# Altium PCB PCB1.PcbDoc
Units mm, origin at the board's own origin, x right, y up, seen from the top; angles counter-clockwise.
Board outline 63.7 x 33.37 mm, 2 copper layers (Top Layer, Bottom Layer), stack 1.57 mm thick; 34 components, 42 nets, 188 pads, 66 vias.
Unrouted connection lines stored in the file: 1.
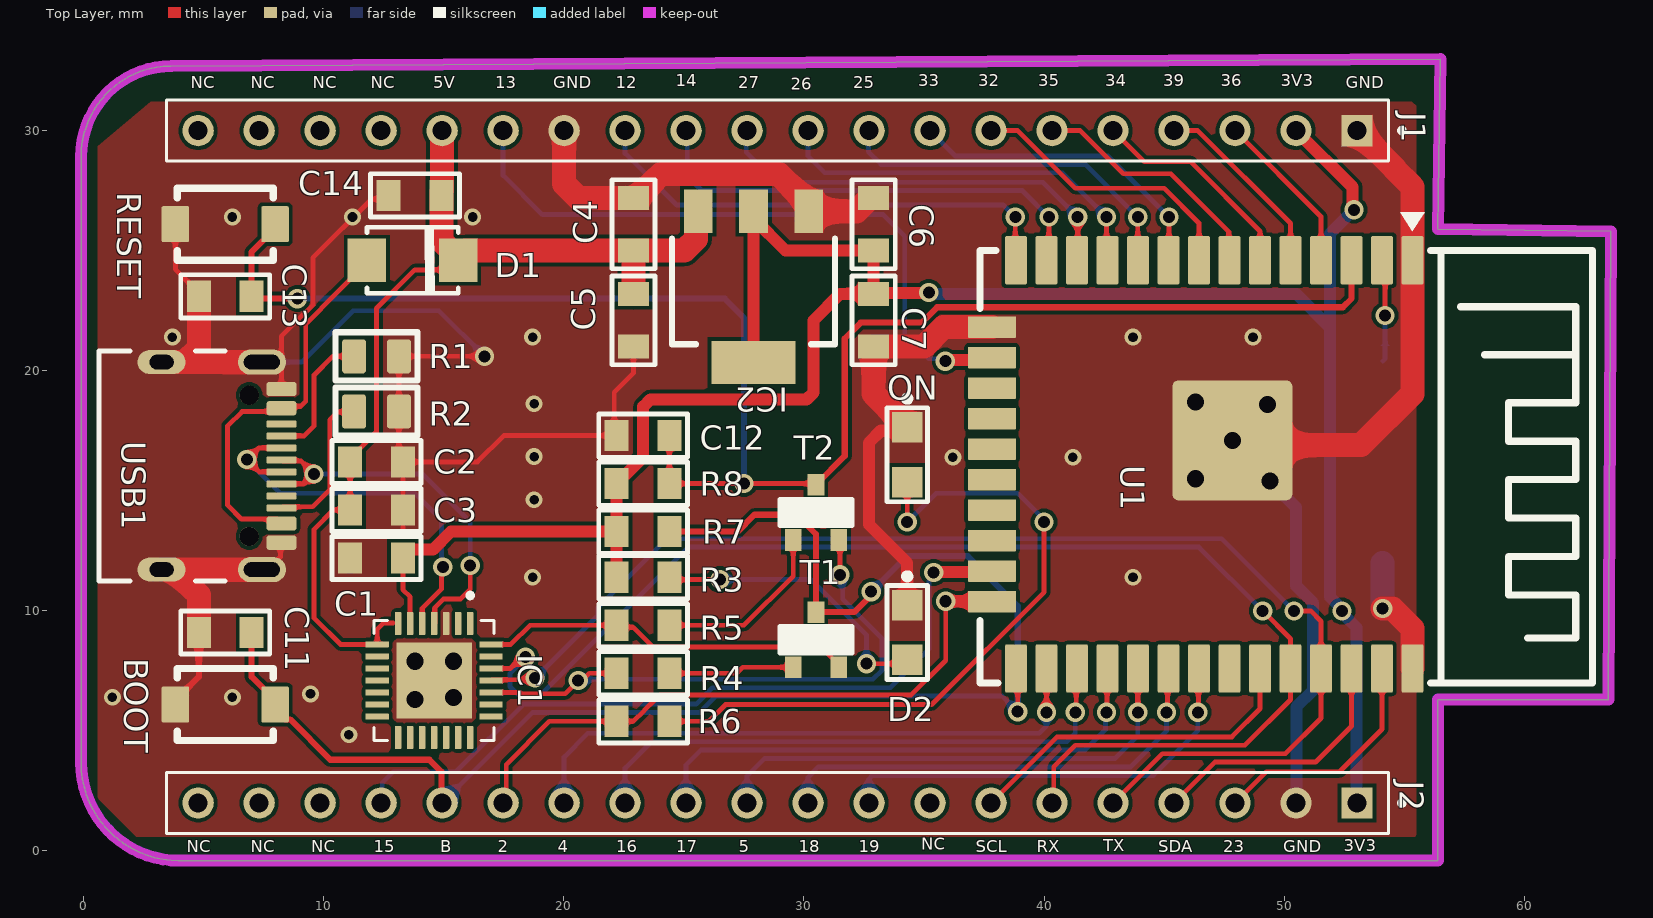
[diagram p0: Top Layer view]
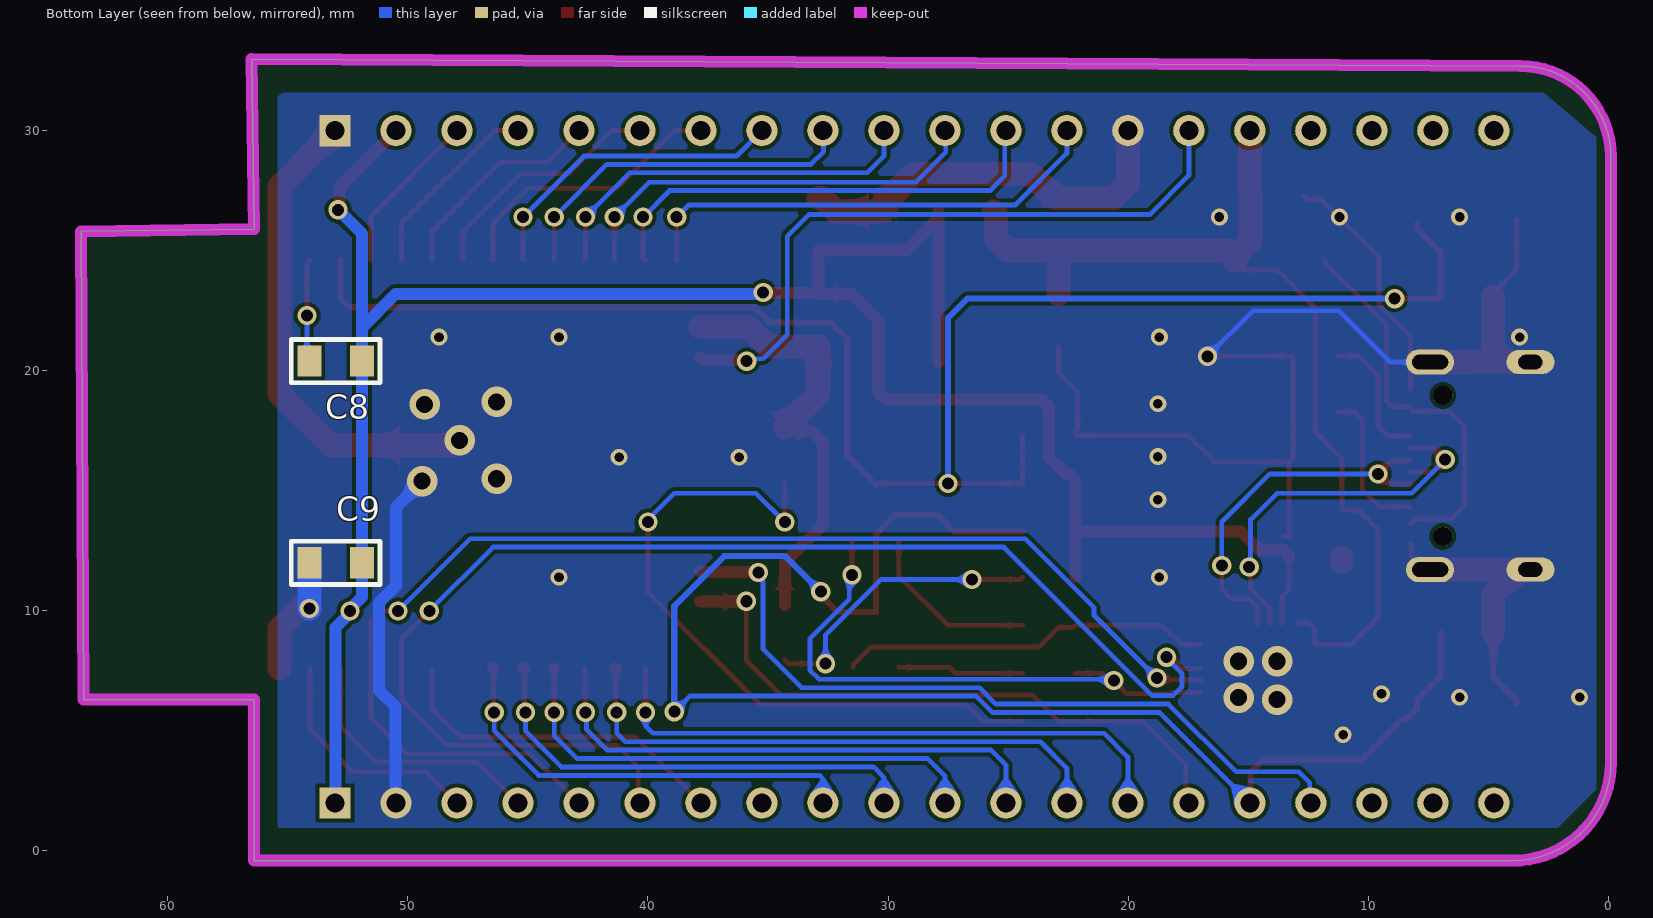
[diagram p1: Bottom Layer view, seen from below]
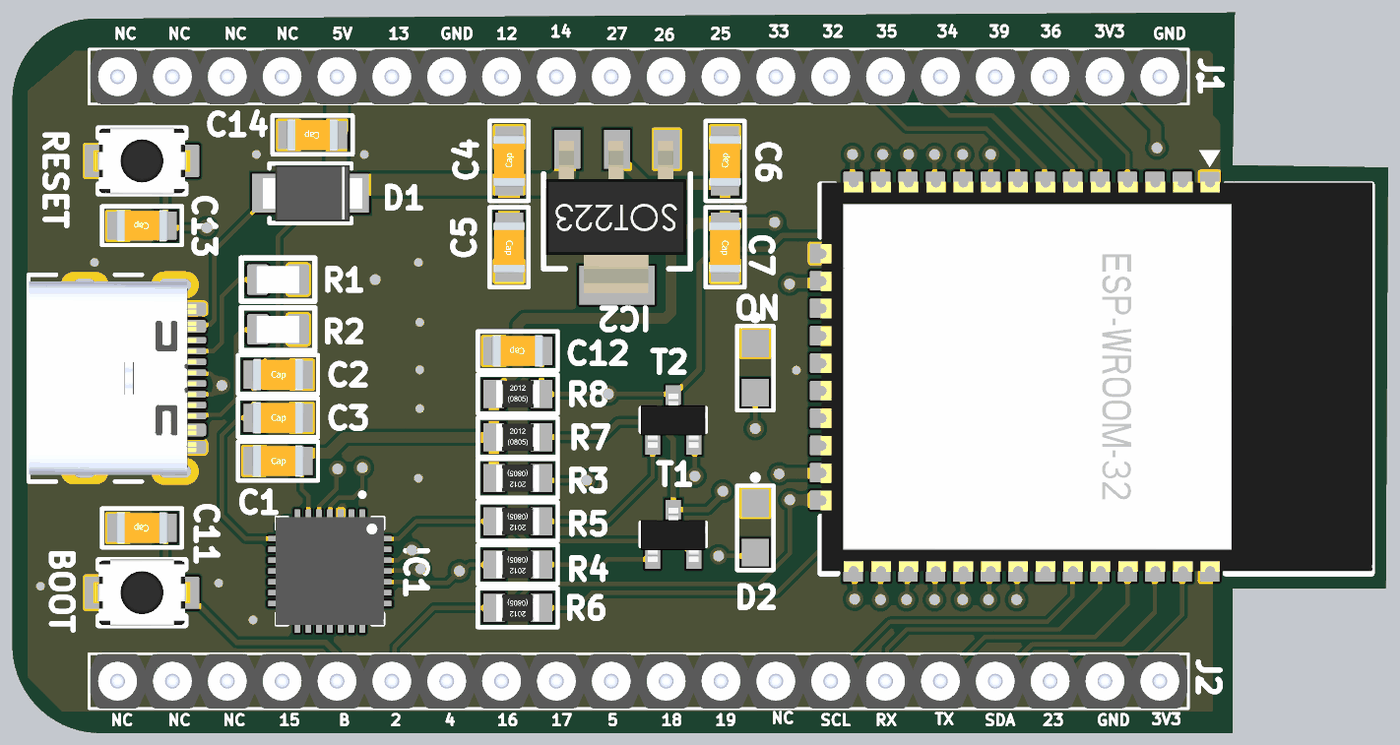
[diagram p2: 3D render of the assembled board from above, using the file's embedded part models]

## Layer stack, top to bottom
Top Solder: solder mask 0.01, Solder Resist, Dk 3.5
Top Layer: signal copper 0.03
Dielectric 1: dielectric 1.51, FR-4, Dk 4.8
Bottom Layer: signal copper 0.03
Bottom Solder: solder mask 0.01, Solder Resist, Dk 3.5

## Board outline
-0.1,3.673 -0.098,28.7 -0.098,28.929 cw(c3.659,28.929) 3.659,32.686 56.506,32.974 56.4,25.9 63.6,25.8 63.5,6.3 56.4,6.3 56.4,-0.4 3.973,-0.4 cw(c3.973,3.673)

## Design rules (kind name [scope] priority, off if disabled: settings)
Clearance [All] p1: gap=0.15 ignorepadtopadclearanceinfootprint=FALSE
PlaneConnect [All] p1: planeconnectstyle=Direct reliefexpansion=0.508 reliefentries=4 reliefconductorwidth=0.254 reliefairgap=0.254
PolygonConnect [All] p1: connectstyle=Direct reliefconductorwidth=0.254 reliefentries=4 polygonreliefangle="90 Angle" airgapwidth=0.254
RoutingVias [All] p1: holewidth=0.5 width=0.8 viastyle="Through Hole" minholewidth=0.5 minwidth=0.6 maxholewidth=0.6 maxwidth=1
SolderMaskExpansion [All] p1: expansion=0.102 istentingtop=FALSE
Width [All] p1: maxlimit=1.5 minlimit=0.2 preferedwidth=0.2
29 further rules are at their usual default settings.

## Components (designator, comment, footprint, x,y, rotation, side; value= is the part's Value field where it differs from the comment)
BOOT "BTN_BOOT" "Button 3x4mm" 5.9,6.1 r180 top value="SW chip 2 pin"
C1 "1uF-0805" CAP0805 12.2,12.2 r0 top
C2 "10uF-0805" CAP0805 12.2,16.2 r0 top
C3 "100nF-0805" CAP0805 12.2,14.2 r0 top
C4 "10uF-0805" CAP0805 22.9,26.1 r90 top
C5 "100nF-0805" CAP0805 22.9,22.1 r270 top
C6 "10uF-0805" CAP0805 32.9,26.1 r90 top
C7 "100nF-0805" CAP0805 32.9,22.1 r270 top
C8 "100nF-0805" CAP0805 53,20.4 r0 bottom
C9 "100nF-0805" CAP0805 53,12 r0 bottom
C11 "10uF-0805" CAP0805 5.9,9.1 r180 top
C12 "10uF-0805" CAP0805 23.3,17.3 r180 top
C13 "100nF-0805" CAP0805 5.9,23.1 r180 top
C14 "100nF-0805" CAP0805 13.8,27.3 r180 top
D1 "SS54F" SMAF 13.8,24.6 r0 top
D2 "LED0805" LED0805 34.3,9.1 r270 top
IC1 "CP2102" QFN-28 14.6,7.1 r270 top
IC2 "LD1117" SOT223 27.9,24.1 r180 top
J1 "D01-9922046" HARWIN_D01-9922046 28.9,30 r180 top
J2 "D01-9922046" HARWIN_D01-9922046 28.9,2 r180 top
ON "LED0805" LED0805 34.3,16.5 r270 top
R1 "5k6" R0805 12.2,20.6 r180 top
R2 "5k6" R0805 12.2,18.3 r0 top
R3 "1K-0805" RES0805 23.3,11.4 r180 top
R4 "10K-0805" RES0805 23.3,7.4 r180 top
R5 "10K-0805" RES0805 23.3,9.4 r180 top
R6 "1K-0805" RES0805 23.3,5.4 r180 top
R7 "10K-0805" RES0805 23.3,13.3 r0 top
R8 "10K-0805" RES0805 23.3,15.3 r0 top
RESET "BTN_RESET" "Button 3x4mm" 5.9,26.1 r180 top value="SW chip 2 pin"
T1 "NPN_SOT23" SOT23 30.5,8.8 r0 top
T2 "NPN_SOT23" SOT23 30.5,14.1 r0 top
U1 "ESP-WROOM-32" "ESP32 WROOM" 55.34,24.6 r270 top
USB1 "TYPE_C_16PIN" USB_TYPEC_16PIN 3.249,16.037 r270 top

## Footprints (in the part's own frame and the unit in brackets; to place one, negate y for a bottom-side part, rotate by r counter-clockwise, add the part's x,y. Pads: shape width x height; smd on the part's side, far side on the other; paste and mask are expansions set on the pad)
"Button 3x4mm" [mm] "SMD 3x4mm"
  rrect10% 1.143x1.5 smd: 1(-2.075,0) 2(2.075,0)
  silkscreen extent -2,-1.5 2,1.5, body extent -2.25,-1.55 2.25,1.55, height 2.05
CAP0805 [mm]
  rect 1x1.3 smd: 1(-1.1,0) 2(1.1,0)
  silkscreen extent -1.85,-0.9 1.85,0.9, body extent -1.2,-0.73 1.2,0.73, height 0.65
"ESP32 WROOM" [mm] "ESP32 WROOM"
  rrect10% 2x0.9 smd: 1(0,0) 2(0,-1.27) 3(0,-2.54) 4(0,-3.81) 5(0,-5.08) 6(0,-6.35) 7(0,-7.62) 8(0,-8.89) 9(0,-10.16) 10(0,-11.43) 11(0,-12.7) 12(0,-13.97) 13(0,-15.24) 14(0,-16.51) 25(17,-16.51) 26(17,-15.24) 27(17,-13.97) 28(17,-12.7) 29(17,-11.43) 30(17,-10.16) 31(17,-8.89) 32(17,-7.62) 33(17,-6.35) 34(17,-5.08) 35(17,-3.81) 36(17,-2.54) 37(17,-1.27) 38(17,0)
  rrect10% 0.9x2 smd: 15(2.785,-17.51) 16(4.055,-17.51) 17(5.325,-17.51) 18(6.595,-17.51) 19(7.865,-17.51) 20(9.135,-17.51) 21(10.405,-17.51) 22(11.675,-17.51) 23(12.945,-17.51) 24(14.215,-17.51)
  rrect10% 5x5 smd: 39(7.5,-7.5)
  silkscreen extent -2,-18.02 17.6,7.49, body extent -0.54,-18.02 17.53,7.52, height 3
HARWIN_D01-9922046 [mm]
  rect 1.308x1.308 / inner round 1.308 / far side rect 1.308x1.308 hole 0.8: 1(-24.13,0)
  round 1.308 hole 0.8: 2(-21.59,0) 3(-19.05,0) 4(-16.51,0) 5(-13.97,0) 6(-11.43,0) 7(-8.89,0) 8(-6.35,0) 9(-3.81,0) 10(-1.27,0) 11(1.27,0) 12(3.81,0) 13(6.35,0) 14(8.89,0) 15(11.43,0) 16(13.97,0) 17(16.51,0) 18(19.05,0) 19(21.59,0) 20(24.13,0)
  silkscreen extent -26.1,-1.27 25.45,1.27, body extent -25.4,-1.27 25.4,1.27, height 8.65
LED0805 [mil] "Chip Resistor; Body 2.0 x 1.3 mm (LxW typ)"
  rect 50x50 smd: 1(-45,0) 2(45,0)
  silkscreen extent -97,-33 77,33, body extent -60,-25 60,25, height 47
QFN-28 [mm]
  rrect25% 0.97x0.26 smd: 1(-2.37,1.5) 2(-2.37,1) 3(-2.37,0.5) 4(-2.37,0) 5(-2.37,-0.5) 6(-2.37,-1) 7(-2.37,-1.5) 15(2.37,-1.5) 16(2.37,-1) 17(2.37,-0.5) 18(2.37,0) 19(2.37,0.5) 20(2.37,1) 21(2.37,1.5)
  rrect25% 0.26x0.97 smd: 8(-1.5,-2.37) 9(-1,-2.37) 10(-0.5,-2.37) 11(0,-2.37) 12(0.5,-2.37) 13(1,-2.37) 14(1.5,-2.37) 22(1.5,2.37) 23(1,2.37) 24(0.5,2.37) 25(0,2.37) 26(-0.5,2.37) 27(-1,2.37) 28(-1.5,2.37)
  rect 3.15x3.15 smd paste-0.575: 29(0,0)
  silkscreen extent -3.64,-2.5 2.5,2.5, body extent -2.5,-2.5 2.5,2.5, height 1
R0805 [mm]
  rrect25% 1x1.42 smd: 1(-0.935,0) 2(0.935,0)
  silkscreen extent -1.7,-1 1.7,1, body extent -1,-0.63 1,0.63, height 0.6
RES0805 [mm]
  rect 1x1.3 smd: 1(-1.1,0) 2(1.1,0)
  silkscreen extent -1.85,-0.9 1.85,0.9, body extent -0.99,-0.62 1.01,0.63, height 0.45
SMAF [mm]
  rect 1.6x1.8 smd: A(-2,0) C(1.8,0)
  silkscreen extent -2,-1.38 1.8,1.38, body extent -2.3,-1.3 2.3,1.3, height 1.11
SOT23 [mm] "SOT 23 _ 1-3-2"
  rect 0.7x0.9 smd: 1(-0.95,-1.15) 2(0.95,-1.15) 3(0,1.15)
  silkscreen extent -1.5,-0.55 1.5,0.55, body extent -1.5,-1.28 1.5,1.22, height 1.06
SOT223 [mm]
  rect 1.2x1.8 smd: 1(-2.3,-2.54) 2(0,-2.54) 3(2.3,-2.54)
  rect 3.5x1.8 smd: 4(0,3.76)
  silkscreen extent -3.4,-1.4 3.4,3, body extent -3.2,-2.91 3.3,4.11, height 1.6
USB_TYPEC_16PIN [mm]
  rrect40% 0.6x1.25 smd: A1_B12(-3.2,4.993) A4_B9(-2.4,4.993) B1_A12(3.2,4.993) B4_A9(2.4,4.993)
  rrect40% 0.3x1.25 smd: A5(-1.25,4.993) A6(-0.25,4.993) A7(0.25,4.993) A8(1.25,4.993) B5(1.75,4.993) B6(0.75,4.993) B7(-0.75,4.993) B8(-1.75,4.993)
  round 0.8 hole 0.8 unplated: MH1(2.937,3.651) MH2(-2.937,3.651)
  oval 1.05x2 hole 0.6 slot 1.5 at 90 deg: S1(-4.32,4.18) S4(4.32,4.18)
  oval 1x2 hole 0.6 slot 1 at 90 deg: S2(-4.32,0) S3(4.32,0)
  silkscreen extent -4.79,-2.6 4.79,2.65, body extent -4.47,-2.58 4.47,5.17, height 3.17

## Part data
BOOT RESET: library part SW2_1, "Switch button 2 pin"
C1: library part CC0805KRX5R7BB105, "CAP CER 1UF 16V X5R 0805", Manufacturer=Yageo, Operating Temperature="-55°C ~ 85°C", Package / Case="0805 (2012 Metric)", Ratings=-, Supplier Part Number 1=311-3427-2-ND, Temperature Coefficient=X5R, Tolerance=±10%, Voltage - Rated=16V, Applications="General Purpose", Category=Capacitors, ComponentLink1Description=http://www.yageo.com/documents/recent/UPY-GPHC_X5R_4V-to-50V_25.pdf, ComponentLink1URL=http://www.yageo.com/documents/recent/UPY-GPHC_X5R_4V-to-50V_25.pdf, Failure Rate=-, Features=-, Height - Seated (Max)=-, Lead Spacing=-, Lead Style=-, Manufacturer Part Number=CC0805KRX5R7BB105, Mounting Type="Surface Mount, MLCC", Notification="Current market demand for these product types have resulted in fluctuating and extending lead times. Lead times may differ.", Packaging="Tape & Reel (TR)", Part Status=Active, Pricing 1="4000=0.0422 (USD)", RoHS="RoHS Compliant", Size / Dimension="0.079\" L x 0.049\" W (2.00mm x 1.25mm)", Stock 1=0, Supplier 1=Digi-Key, Thickness (Max)="0.057\" (1.45mm)"
C2 C3 C4 C5 C6 C7 C8 C9 C11 C12 C13 C14: library part CC0805KRX7R9BB104, "CAP CER 0.1UF 50V X7R 0805", Manufacturer=Yageo, Operating Temperature="-55°C ~ 125°C", Package / Case="0805 (2012 Metric)", Ratings=-, Supplier Part Number 1=311-1140-1-ND, Temperature Coefficient=X7R, Tolerance=±10%, Voltage - Rated=50V, Applications="General Purpose", Category=Capacitors, ComponentLink1Description=http://www.yageo.com/documents/recent/UPY-GPHC_X7R_6.3V-to-50V_18.pdf, ComponentLink1URL=http://www.yageo.com/documents/recent/UPY-GPHC_X7R_6.3V-to-50V_18.pdf, Failure Rate=-, Features="High Voltage", Height - Seated (Max)=-, Lead Spacing=-, Lead Style=-, Manufacturer Part Number=CC0805KRX7R9BB104, Mounting Type="Surface Mount, MLCC", Notification="Current market demand for these product types have resulted in fluctuating and extending lead times. Lead times may differ.", Packaging="Cut Tape (CT)", Part Status=Active, Pricing 1="1=0.13, 10=0.093, 100=0.0439, 500=0.03076, 1000=0.02547 (USD)", RoHS="RoHS Compliant", Size / Dimension="0.079\" L x 0.049\" W (2.00mm x 1.25mm)", Stock 1=0, Supplier 1=Digi-Key, Thickness (Max)="0.033\" (0.85mm)"
D1: Package=SMAF, DeviceSetName=SS54F, GateName_1=G$1, LibraryName=Uy_SMD, SymbolName_1=DIODE_S
D2 ON: library part LED, "LED 0805", Manufacturer="Visual Communications", Manufacturer Part Number=LSM0805452V, Supplier Part Number=28-LSM0805452VDKR-ND, Category=LEDs, Pricing="1=0.4, 10=0.263, 100=0.1752, 500=0.1212, 1000=0.101 (USD)", RoHS=Yes, Stock=55385, Supplier=Digi-Key
IC1: "CP2102N USB 2.0 to UART (RS232) Bridge Interface Evaluation Board", Package="WFQFN-20 Silicon Labs", AVAILABILITY="In Stock", Check_prices=https://www.snapeda.com/parts/CP2102/Silicon+Labs/view-part/?ref=eda, MF="Silicon Labs", MP=CP2102, PRICE=None, Purchase-URL=https://pricing.snapeda.com/search/part/CP2102/?ref=eda, SnapEDA_Link=https://www.snapeda.com/parts/CP2102/Silicon+Labs/view-part/?ref=snap
IC2: Package=SOT223-3.3, DeviceSetName=AMS1117, GateName_1=G$1, LibraryName=Uy_SMD, SymbolName_1=AMS1117
J1 J2: "2.54mm (0.1) Pitch SIL Vertical Through Connect Header Strip, tin (hi-temp mould), 20 contacts", Package=None, Check_prices=https://www.snapeda.com/parts/D01-9922046/Harwin/view-part/?ref=eda, MF=Harwin, MP=D01-9922046, SnapEDA_Link=https://www.snapeda.com/parts/D01-9922046/Harwin/view-part/?ref=snap
R1 R2: library part "Resistor 0805", "SMD Resistor 0805", Case Code (Imperial)=0603, Case Code (Metric)=1608, Manufacturer=Yageo, Manufacturer Part Number=RC0603FR-071KL, Max Operating Temperature=155°C, Max Power Dissipation=100mW, Min Operating Temperature=-55°C, Resistance Tolerance=1%, Resistor Type="Thick Film", Supplier Part Number=311-1.00KHRDKR-ND, Temperature Coefficient=100ppm/°C, Voltage Rating=50V, Case/Package=0603, Category="Chip SMD Resistors", Construction=Rectangular, Contact Plating=Tin,Matte, Depth=0.8mm, Features="Moisture Resistant", Height=0.45mm, Lead Free=5697LeadFree, Length=1.6mm, Military Standard=Not, Number of Terminations=2, Packaging="Tape and Reel", Power Rating=100mW, Pricing="1=0.1, 10=0.018, 50=0.0106, 100=0.0088, 500=0.00592, 1000=0.00505 (USD)", Reach SVHC Compliant=No, RoHS=Yes, RoHS Compliant=Yes, Series=RC, Stock=18662657, Supplier=Digi-Key, Technology="THICK FILM", Termination=SMD/SMT, Tolerance=1%
R3 R6: library part RC0805JR-071KL, "RES SMD 1K OHM 5% 1/8W 0805", Manufacturer=Yageo, Operating Temperature="-55°C ~ 155°C", Package / Case="0805 (2012 Metric)", Power (Watts)="0.125W, 1/8W", Supplier Device Package=0805, Supplier Part Number 1=311-1.0KARCT-ND, Temperature Coefficient=±100ppm/°C, Tolerance=±5%, Category=Resistors, ComponentLink1Description=http://www.yageo.com/documents/recent/PYu-RC_Group_51_RoHS_L_9.pdf, ComponentLink1URL=http://www.yageo.com/documents/recent/PYu-RC_Group_51_RoHS_L_9.pdf, Composition="Thick Film", Failure Rate=-, Features="Moisture Resistant", Height - Seated (Max)="0.024\" (0.60mm)", Manufacturer Part Number=RC0805JR-071KL, Packaging="Cut Tape (CT)", Part Status=Active, Pricing 1="1=0.1, 10=0.036, 100=0.0145, 1000=0.00652, 2500=0.00566 (USD)", RoHS="RoHS Compliant", Size / Dimension="0.079\" L x 0.049\" W (2.00mm x 1.25mm)", Stock 1=13266, Supplier 1=Digi-Key
R4 R5 R7 R8: library part RC0805JR-0710KL, "RES SMD 10K OHM 5% 1/8W 0805", Manufacturer=Yageo, Operating Temperature="-55°C ~ 155°C", Package / Case="0805 (2012 Metric)", Power (Watts)="0.125W, 1/8W", Supplier Device Package=0805, Supplier Part Number 1=311-10KARCT-ND, Temperature Coefficient=±100ppm/°C, Tolerance=±5%, Category=Resistors, ComponentLink1Description=http://www.yageo.com/documents/recent/PYu-RC_Group_51_RoHS_L_9.pdf, ComponentLink1URL=http://www.yageo.com/documents/recent/PYu-RC_Group_51_RoHS_L_9.pdf, Composition="Thick Film", Failure Rate=-, Features="Moisture Resistant", Height - Seated (Max)="0.024\" (0.60mm)", Manufacturer Part Number=RC0805JR-0710KL, Packaging="Cut Tape (CT)", Part Status=Active, Pricing 1="1=0.1, 10=0.036, 100=0.0145, 1000=0.00652, 2500=0.00566 (USD)", RoHS="RoHS Compliant", Size / Dimension="0.079\" L x 0.049\" W (2.00mm x 1.25mm)", Stock 1=0, Supplier 1=Digi-Key
T1 T2: "BJT SOT23", Package=SOT23(1), DeviceSetName=NPN, GateName_1=G$1, LibraryName=Uy_SMD, SymbolName_1=NPN
USB1: Package=GCT_USB4105-GF-A, AVAILABILITY=Warning, DeviceSetName=TYPE_C_FEMALE, GateName_1=G$1, LibraryName=Uy_SMD, MF=GCT, MP=USB4105-GF-A, PRICE=None, SymbolName_1=USB4105-GF-A

## Via types
v1: diameter 0.8, hole 0.5, Top Layer to Bottom Layer, tented both sides, 39 vias
v2: diameter 0.7, hole 0.4, Top Layer to Bottom Layer, tented both sides, 18 vias
v3: diameter 1.27, hole 0.711, Top Layer to Bottom Layer, tented both sides, 9 vias

## Nets (pads, with @x,y where several pads share a name; then routed paths per layer and width w, separated by ;. In a path a pad name is that pad's centre, name@x,y a point inside that pad or via, vN(x,y) a via of type N, cw(c..) or ccw(c..) an arc to the next point about the centre after c; other vN are vias at no path point)
+3V3: C1.2 C6.1 C7.1 C8.1 C9.1 IC1.6 IC2.2 IC2.4 J1.2 J2.1 R3.2 R7.1 R8.1 | length 97.5
  Top Layer w0.2: C1.2 13.3,10.887 13.6,10.587 IC1.6
  Top Layer w0.5: C1.2 13.3,12.302 13.55,12.552 14.55,12.552 15.298,13.3 R7.1 ; R3.2 R7.1 ; IC2.4 IC2.2@27.9,26.34 ; IC2.2 IC2.2@27.9,26.34 ; v1(35.2,23.254) 35.173,23.227 32.927,23.227 C7.1 ; J1.2 52.843,27.647 52.843,26.757 v1(52.9,26.7) ; R7.1 R8.1 22.2,15.45 22.45,15.7 22.6,15.7 23.3,16.4 23.3,18.5 23.6,18.8 30.107,18.8 30.4,19.093 30.4,22.1 31.5,23.2 C7.1 ; IC2.2@27.9,26.34 29.24,25 C6.1 C7.1
  Bottom Layer w0.5: v1(35.2,23.254) 35.254,23.2 50.5,23.2 51.9,21.8 C8.1@51.9,20.7 ; v1(52.9,26.7) 51.9,25.7 C8.1 C9.1 51.9,10.581 52.4,10.081 52.4,9.919 53.015,9.304 53.015,2.015 J2.1
  other v1: 52.4,10
+5V: C2.1 C3.1 C4.1 C5.1 C14.1 D1.C IC1.7 IC1.8 IC2.3 J1.16 | length 42
  Top Layer w0.2: 12.9,9.5 12.5,9.5 12.23,9.23 IC1.8 10.7,8.6 9.6,9.7 9.6,13.4 10.4,14.2 C3.1 C2.1 11.1,16.35 12.2,17.45 12.2,22.6 13.8,24.2 15.2,24.2 D1.C
  Top Layer w1: J1.16 14.93,27.48 14.9,27.45 C14.1 14.9,25.4 D1.C@15.6,24.7 ; D1.C D1.C@15.6,24.7 ; C5.1 C4.1 ; IC2.3 25.5,26.54 25.5,25.486 25.014,25 C4.1 ; D1.C@15.6,24.7 15.9,25 C4.1
DM: IC1.5 USB1.A7 USB1.B7 | length 17.1
  Top Layer w0.2: USB1.A7 7.313,15.787 v1(6.8,16.3) 6.816,16.3 7.303,16.787 USB1.B7 ; IC1.5 14.1,10.1 14.9,10.9 14.9,11.771 v1(14.959,11.83)
  Bottom Layer w0.2: v1(6.8,16.3) 8.2,14.9 13.8,14.9 14.9,13.8 14.9,11.889 v1(14.959,11.83)
DP: IC1.4 USB1.A6 USB1.B6 | length 15.7
  Top Layer w0.2: USB1.B6 9.167,15.287 9.58,15.7 v1(9.6,15.7) 9.063,16.237 8.292,16.237 USB1.A6 ; IC1.4 14.63,9.5 14.63,10.135 14.995,10.5 15.7,10.5 16.1,10.9 v1(16.1,11.888)
  Bottom Layer w0.2: v1(9.6,15.7) 14.1,15.7 16.1,13.7 v1(16.1,11.888)
DTR: IC1.28 R5.2 T1.2 | length 15.6
  Top Layer w0.2: IC1.28 17.793,8.6 18.593,9.4 R5.2 22.283,9.317 22.883,9.317 23.7,8.5 30.7,8.5 31.45,7.75 T1.2
EBOOT: BOOT.1 C11.1 J2.16 R7.2 T1.3 U1.25 | length 65.5
  Top Layer w0.2: U1.25 38.9,7.53 v1(38.9,5.8)
  Top Layer w0.254: C11.1 7,7.254 7.975,6.279 BOOT.1 7.975,5.921 8.419,5.477 8.598,5.477 10.275,3.8 14.4,3.8 14.9,3.3 14.9,2.03 J2.16 ; R7.2 27.237,13.3 27.937,14 29.692,14 30.5,13.192 T1.3 32.102,9.95 32.336,10.184 32.336,10.189 32.8,10.652 v1(32.8,10.8)
  Bottom Layer w0.2: J2.16 18.7,5.77 25.651,5.77 26.331,6.45 26.496,6.45 38.25,6.45 v1(38.9,5.8)
  Bottom Layer w0.254: v1(32.8,10.8) 34.277,12.277 36.823,12.277 38.9,10.2 v1(38.9,5.8)
ERST: C12.1 C13.1 R8.2 RESET.1 T2.3 U1.3 | length 69.2
  Top Layer w0.2: C12.1 R8.2 v1(27.5,15.3) T2.3@30.45,15.3
  Top Layer w0.254: RESET.1 7.975,25.921 7,24.946 C13.1 7.1,23 v1(8.9,23) ; T2.3 31.7,16.45 31.7,21.342 32.358,22 34.903,22 35.545,22.642 52.442,22.642 52.8,23 U1.3
  Bottom Layer w0.254: v1(8.9,23) 26.7,23 27.5,22.2 v1(27.5,15.3)
ERX0: IC1.26 J2.6 U1.34 | length 55.2
  Top Layer w0.2: IC1.26 17.767,7.6 18.237,8.07 v1(18.4,8.07) ; J2.6 40.4,2.07 40.4,3.5 41.3,4.4 48.36,4.4 50.26,6.3 50.26,8.84 v1(49.1,10)
  Bottom Layer w0.2: v1(18.4,8.07) 18.4,7.77 18.137,7.77 17.756,7.389 17.756,6.851 18.137,6.47 18.989,6.47 25.173,12.654 46.446,12.654 v1(49.1,10)
ETX0: IC1.25 J2.5 U1.35 | length 52.8
  Top Layer w0.2: IC1.25 17,7.13 18.73,7.13 v1(18.8,7.2) ; J2.5 44.92,4.05 50.05,4.05 51.53,5.53 U1.35 51.53,9.57 51.1,10 v1(50.4,10)
  Bottom Layer w0.2: v1(18.8,7.2) 21.427,9.827 21.427,10.142 24.29,13.004 47.396,13.004 v1(50.4,10)
GND: BOOT.2 C1.1 C2.2 C3.2 C4.2 C5.2 C6.2 C7.2 C9.2 C11.2 C12.2 C13.2 C14.2 D2.1 IC1.3 IC1.29 IC2.1 J1.1 J1.14 J2.2 ON.1 R1.1 R2.2 RESET.2 U1.1 U1.15 U1.38 U1.39 USB1.A1_B12 USB1.B1_A12 USB1.S1 USB1.S2 USB1.S3 USB1.S4 | length 145.4
  Top Layer w0.2: RESET.2@3.825,26.278 RESET.2 3.825,24.225 4.8,23.25 C13.2 ; USB1.S4 7.674,11.717 8.2,12.243 8.2,12.795 USB1.B1_A12 ; USB1.S1 7.843,20.357 USB1.S1@8.242,19.958 ; USB1.A1_B12 USB1.S1@8.242,19.958 ; C14.2 12.55,27.15 12,27.15 9.55,24.7 9.55,22.731 9.169,22.35 9.155,22.35 8.242,21.437 USB1.S1@8.242,19.958 ; 13.547,13.1 13.303,13.1 13.3,13.103 C2.2 ; v1(16.7,20.6) R1.1 R2.2 13.135,16.365 C2.2 ; C5.2 22.9,19.9 22.1,19.1 22.1,17.55 22.2,17.45 C12.2 17.5,17.3 16.4,16.2 C2.2
  Top Layer w0.254: BOOT.2 3.825,6.279 4.8,7.254 C11.2
  Top Layer w0.5: D2.1 34.3,12 32.7,13.6 32.7,17 33.208,17.508 34.165,17.508 ON.1
  Top Layer w1: USB1.S3 USB1.S3@3.749,11.717 ; USB1.S2 USB1.S2@4.214,20.357 ; C11.2 4.8,10.666 USB1.S3@3.749,11.717 ; C13.2 4.8,20.943 USB1.S2@4.214,20.357 ; USB1.S4 USB1.S3@3.749,11.717 ; USB1.S1 USB1.S2@4.214,20.357 ; C1.1@11.1,12.05 C1.1 ; J1.14 20.01,27.786 20.596,27.2 C4.2 23.05,27.2 24.04,28.19 28.95,28.19 30.2,26.94 IC2.1 32.19,26.64 32.75,27.2 C6.2 ; ON.1 32.9,19.043 C7.2 35.002,21 35.817,21.815 U1.15 ; U1.39@46.24,18.7 v3(46.3,18.7) ; v3(47.84,17.1) 48.04,16.9 53.2,16.9 55.34,19.04 U1.1 55.34,27.66 54.598,28.402 54.598,28.432 J1.1 ; v1(54.1,10.1) 54.5,10.1 55.34,9.26 U1.38
  Bottom Layer w0.2: USB1.S1 9.083,20.357 11.226,22.5 14.8,22.5 v1(16.7,20.6)
  Bottom Layer w0.5: v3(49.4,15.4) 50.49,14.31 50.49,11.041 51.2,10.331 51.2,6.695 50.506,6.001 50.506,2.016 J2.2
  Bottom Layer w1: v1(54.1,10.1) C9.2
  other v2: 11.049,4.842 1.2,6.4 6.2,6.4 9.449,6.542 18.7,11.4 43.7,11.4 18.764,14.624 36.2,16.4 41.2,16.4 18.764,16.424 18.764,18.624 3.7,21.4 18.7,21.4 43.7,21.4 48.7,21.4 6.2,26.4 11.2,26.4 16.2,26.4
  other v3: 13.8,6.3 15.4,6.385 13.8,7.9 15.4,7.9 46.3,15.5 49.3,18.6
GPIO2: J2.15 R6.2 U1.24 | length 26.1
  Top Layer w0.2: J2.15 17.6,2.13 17.6,3.6 19.4,5.4 R6.2 22.9,5.4 23.348,5.848 23.348,5.852 23.796,6.3 23.8,6.3 24,6.5 34.467,6.5 35.9,7.933 35.9,10.385 v1@35.907,10.393
  Top Layer w0.5: v1(35.9,10.4) 35.907,10.393 37.822,10.393 U1.24
GPIO4: J2.14 U1.26 | length 25
  Top Layer w0.2: v1@40.1,5.7 U1.26
  Bottom Layer w0.2: J2.14 20.01,3.91 21,4.9 39.8,4.9 40.093,5.193 40.093,5.768 v1(40.1,5.775)
GPIO5: J2.11 U1.29 | length 20.9
  Top Layer w0.2: v1@43.905,5.605 U1.29@43.905,7.595
  Top Layer w0.5: v1@43.9,5.773 v1@43.905,5.778 ; U1.29@43.905,7.595 U1.29
  Bottom Layer w0.2: J2.11 27.63,3.13 28.35,3.85 42.95,3.85 43.9,4.8 v1@43.9,5.6
  other v1: 43.9,5.775
GPIO12: J1.13 U1.14 | length 20.1
  Top Layer w0.2: v1(38.8,26.4) 38.8,24.63 U1.14
  Bottom Layer w0.2: J1.13 22.55,29.05 24.7,26.9 38.3,26.9 v1(38.8,26.4)
GPIO13: J1.15 U1.16 | length 27.9
  Top Layer w0.5: v1(35.883,20.396) 35.941,20.454 37.739,20.454 U1.16
  Bottom Layer w0.2: J1.15 17.47,28.13 19.1,26.5 33.3,26.5 34.2,25.6 34.2,21.5 35.2,20.5 35.78,20.5 v1(35.883,20.396)
GPIO14: J1.12 U1.13 | length 19.6
  Top Layer w0.2: U1.13 40.2,24.7 v1(40.2,26.4) v1@40.2,26.5
  Bottom Layer w0.2: J1.12 25.137,29.953 25.137,28.117 25.753,27.5 39.1,27.5 v1(40.2,26.4)
GPIO15: J2.17 U1.23 | length 31.7
  Top Layer w0.5: v1(35.4,11.6) 35.428,11.628 37.802,11.628 U1.23
  Bottom Layer w0.2: J2.17 12.437,2.047 12.437,2.837 12.9,3.3 15.505,3.3 18.325,6.12 25.506,6.12 26.186,6.8 33.6,6.8 35.2,8.4 35.2,11.238 35.4,11.438 v1(35.4,11.6)
GPIO16: J2.13 U1.27 | length 23.7
  Top Layer w0.2: v1@41.335,5.635 U1.27@41.335,7.565
  Top Layer w0.5: v1@41.3,5.758 v1@41.335,5.793 ; U1.27@41.335,7.565 U1.27
  Bottom Layer w0.2: J2.13 22.55,3.45 23.65,4.55 40.95,4.55 41.3,4.9 v1(41.3,5.775)
GPIO17: J2.12 U1.28 | length 22.2
  Top Layer w0.2: v1@42.6,5.765 v1@42.62,5.785 ; v1@42.62,5.62 42.62,7.58 U1.28
  Bottom Layer w0.2: J2.12 25.09,3.59 25.7,4.2 41.7,4.2 42.555,5.055 v1@42.555,5.555 ; v1@42.555,5.753 v1@42.6,5.798
  other v1: 42.6,5.775
GPIO18: J2.10 U1.30 | length 19.4
  Top Layer w0.2: v1@45.14,5.74 U1.30@45.14,7.56
  Top Layer w0.5: v1@45.1,5.755 v1@45.14,5.795 ; U1.30@45.14,7.56 U1.30
  Bottom Layer w0.2: J2.10 30.17,3.07 30.6,3.5 43.6,3.5 45.1,5 v1@45.1,5.7
  other v1: 45.1,5.775
GPIO19: J2.9 U1.31 | length 18.1
  Top Layer w0.2: v1@46.425,5.725 U1.31@46.425,7.575
  Top Layer w0.5: v1@46.4,5.763 v1@46.425,5.788 ; U1.31@46.425,7.575 U1.31
  Bottom Layer w0.2: J2.9 32.71,3.01 32.85,3.15 44.55,3.15 46.4,5 v1@46.4,5.7
  other v1: 46.4,5.775
GPIO21: J2.7 U1.33 | length 14.5
  Top Layer w0.2: J2.7 40.54,4.75 47.818,4.75 48.99,5.922 U1.33
GPIO22: J2.4 U1.36 | length 11.1
  Top Layer w0.2: J2.4 47.11,3.7 51.3,3.7 52.8,5.2 U1.36
GPIO23: J2.3 U1.37 | length 9.9
  Top Layer w0.2: J2.3 49.25,3.3 52.3,3.3 54.07,5.07 U1.37
GPIO25: J1.9 U1.10 | length 15
  Top Layer w0.2: v1(43.9,26.4) 43.9,24.61 U1.10
  Bottom Layer w0.2: J1.9 32.683,29.973 32.683,29.117 33.21,28.59 41.71,28.59 v1(43.9,26.4)
GPIO26: J1.10 U1.11 | length 16.4
  Top Layer w0.2: v1(42.6,26.4) 42.6,24.64 U1.11
  Bottom Layer w0.2: J1.10 30.17,28.93 30.86,28.24 40.76,28.24 v1(42.6,26.4)
GPIO27: J1.11 U1.12 | length 17.6
  Top Layer w0.2: U1.12 41.4,24.63 v1(41.4,26.4)
  Bottom Layer w0.2: J1.11 27.6,29.97 27.6,29.1 28.85,27.85 39.95,27.85 v1(41.4,26.4)
GPIO32: J1.7 U1.8 | length 11.8
  Top Layer w0.2: J1.7 38.9,30 41.3,27.6 45,27.6 46.45,26.15 U1.8
GPIO33: J1.8 U1.9 | length 13.2
  Top Layer w0.2: U1.9 45.2,24.62 v1(45.2,26.4)
  Bottom Layer w0.2: J1.8 36.31,28.94 42.66,28.94 v1(45.2,26.4)
GPIO34: J1.5 U1.6 | length 9.1
  Top Layer w0.2: J1.5 44.17,28.7 46.1,28.7 48.99,25.81 U1.6
GPIO35: J1.6 U1.7 | length 10.3
  Top Layer w0.2: J1.6 41.5,30 43.3,28.2 45.278,28.2 47.695,25.783 47.695,24.625 U1.7
NetC8_2: C8.2 U1.2 | length 4.3
  Top Layer w0.2: U1.2 54.2,24.47 v1(54.2,22.3)
  Bottom Layer w0.2: C8.2 54.2,20.5 v1(54.2,22.3)
NetD1_A: D1.A USB1.A4_B9 USB1.B4_A9 | length 16.5
  Top Layer w0.2: USB1.B4_A9 8.054,13.825 6.575,13.825 6,14.4 6,17.7 6.6,18.3 8.105,18.3 8.32,18.515 9.043,18.515 9.25,18.722 9.25,21.95 9.3,22 9.314,22 9.9,22.586 9.9,22.6 11.8,24.5 D1.A
NetD2_2: D2.2 R3.1 | length 12.2
  Top Layer w0.2: R3.1 24.5,11.3 v1(26.5,11.3) ; v1(32.6,7.8) 34.143,7.8 D2.2
  Bottom Layer w0.2: v1(26.5,11.3) 30.3,11.3 32.6,9 v1(32.6,7.8)
NetON_2: ON.2 R6.1 | length 29.2
  Top Layer w0.2: R6.1 26.038,5.4 26.738,6.1 35.322,6.1 40,10.778 v1(40,13.7) ; v1(34.3,13.7) ON.2
  Bottom Layer w0.2: v1(34.3,13.7) 35.5,14.9 38.9,14.9 40,13.8 v1(40,13.7)
NetR1_2: R1.2 USB1.A5 | length 5.6
  Top Layer w0.2: USB1.A5 9.187,17.287 9.6,17.7 9.6,19.822 10.378,20.6 R1.2
NetR2_1: R2.1 USB1.B5 | length 6.4
  Top Layer w0.2: USB1.B5 8.292,14.337 9.537,14.337 10.25,15.05 10.25,17.95 10.582,18.282 11.247,18.282 R2.1
NetR4_1: R4.1 T1.1 | length 5.3
  Top Layer w0.2: R4.1 27.2,7.4 27.45,7.65 T1.1
NetR5_1: R5.1 T2.1 | length 7.5
  Top Layer w0.2: R5.1 27.5,9.4 29.55,11.45 T2.1
RTS: IC1.24 R4.2 T2.2 | length 24.6
  Top Layer w0.2: IC1.24 18.187,6.6 18.237,6.55 20.05,6.55 v1(20.6,7.1) 20.762,7.1 21.062,7.4 R4.2 ; T2.2 31.5,12.9 v1(31.5,11.5)
  Bottom Layer w0.2: v1(20.6,7.1) 20.65,7.15 32.869,7.15 33.25,7.531 33.25,8.845 31.615,10.48 31.615,11.385 v1(31.5,11.5)
SENSOR_VN: J1.4 U1.5 | length 8
  Top Layer w0.2: J1.4 46.4,30 50.26,26.14 U1.5
SENSOR_VP: J1.3 U1.4 | length 6.9
  Top Layer w0.2: J1.3 51.53,26.42 U1.4
pads on no net: IC1.1 IC1.2 IC1.9 IC1.10 IC1.11 IC1.12 IC1.13 IC1.14 IC1.15 IC1.16 IC1.17 IC1.18 IC1.19 IC1.20 IC1.21 IC1.22 IC1.23 IC1.27 J1.17 J1.18 J1.19 J1.20 J2.8 J2.18 J2.19 J2.20 U1.17 U1.18 U1.19 U1.20 U1.21 U1.22 U1.32 USB1.A8 USB1.B8 USB1.MH1 USB1.MH2

## Polygon pours and split planes (outlines as drawn)
GND on Bottom Layer "GND_L02_P001" (solid, remove dead copper, pour order 1): 0.504,29.718 0.504,2.572 2.104,0.972 55.504,0.972 55.404,1.072 55.404,31.672 55.304,31.572 2.704,31.572
GND on Top Layer "GND_L01_P000" (solid, remove dead copper, pour order 0): 0.6,29.346 0.6,2.2 2.2,0.6 55.6,0.6 55.5,0.7 55.5,31.3 55.4,31.2 2.8,31.2

## Keep-outs
Keep-Out Layer:
  the board outline again, w0.5

## Silkscreen, mask and mechanical layers (free items; w line width, h text height)
Top Overlay:
  text "14" at 24.654,31.854 h0.5
  text "33" at 34.754,31.854 h0.5
  text "32" at 37.254,31.854 h0.5
  text "35" at 39.754,31.854 h0.5
  text "34" at 42.554,31.854 h0.5
  text "39" at 44.954,31.854 h0.5
  text "36" at 47.354,31.854 h0.5
  text "3V3" at 49.854,31.854 h0.5
  text "NC" at 4.454,31.754 h0.5
  text "NC" at 6.954,31.754 h0.5
  text "NC" at 9.554,31.754 h0.5
  text "NC" at 11.954,31.754 h0.5
  text "5V" at 14.554,31.754 h0.5
  text "13" at 17.154,31.754 h0.5
  text "GND" at 19.554,31.754 h0.5
  text "12" at 22.154,31.754 h0.5
  text "27" at 27.254,31.754 h0.5
  text "25" at 32.054,31.754 h0.5
  text "GND" at 52.554,31.754 h0.5
  text "26" at 29.449,31.695 h0.5
  text "NC" at 34.891,0.053 h0.5
  text "TX" at 42.462,-0.002 h0.5
  text "3V3" at 52.476,-0.006 h0.5
  text "NC" at 4.291,-0.047 h0.5
  text "NC" at 6.954,-0.046 h0.5
  text "NC" at 9.491,-0.047 h0.5
  text "15" at 12.091,-0.047 h0.5
  text "B" at 14.854,-0.046 h0.5
  text "2" at 17.254,-0.046 h0.5
  text "4" at 19.754,-0.046 h0.5
  text "16" at 22.191,-0.047 h0.5
  text "17" at 24.691,-0.047 h0.5
  text "5" at 27.291,-0.047 h0.5
  text "18" at 29.791,-0.047 h0.5
  text "19" at 32.291,-0.047 h0.5
  text "SCL" at 37.154,-0.046 h0.5
  text "RX" at 39.7,-0.046 h0.5
  text "SDA" at 44.754,-0.046 h0.5
  text "23" at 47.454,-0.046 h0.5
  text "GND" at 49.954,-0.046 h0.5

## Text inside footprints (layer, text, board x,y; h text height)
U1: Top Assembly "38" at 54.785,7.3 h0.8; Top Assembly "25" at 38.185,7.3 h0.8; Top Assembly "24" at 37.785,11 h0.8 r270; Top Assembly "15" at 37.785,22.4 h0.8 r270; Top Assembly "14" at 38.385,24 h0.8; Top Assembly "1" at 55.285,24 h0.8